# Allegro board QUADCOPTER1snsrbrd1_1.brd
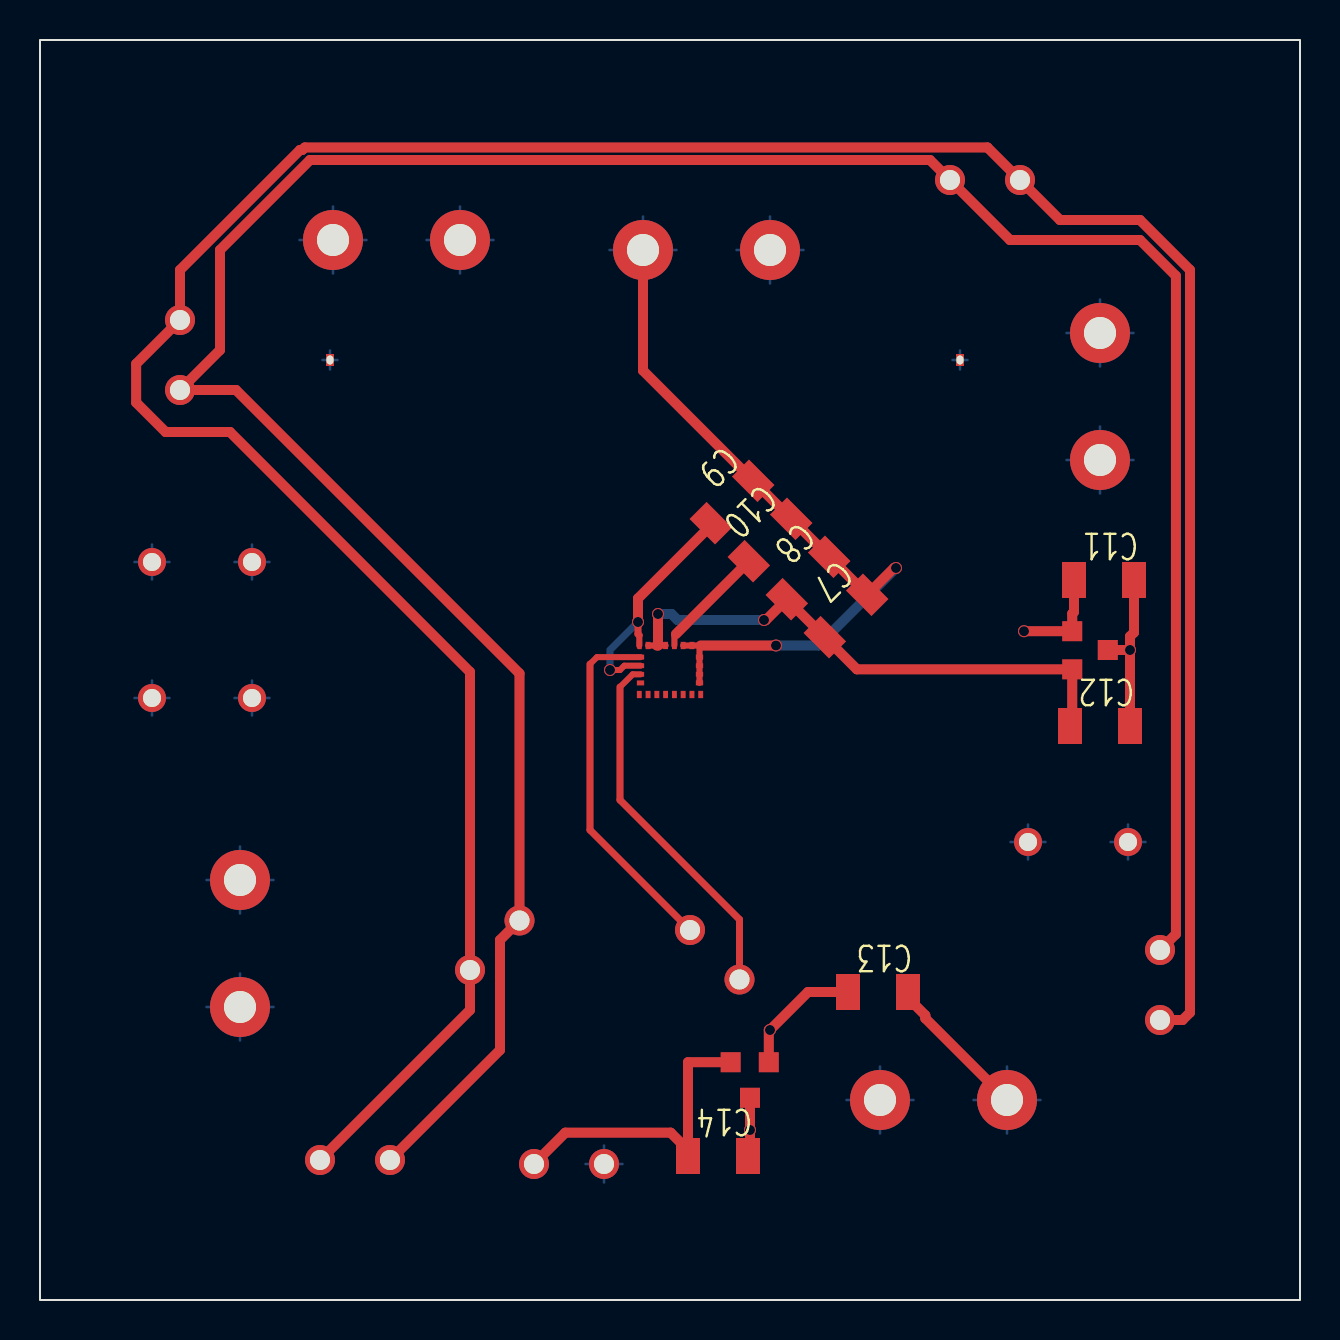
[diagram p0: board, top side]
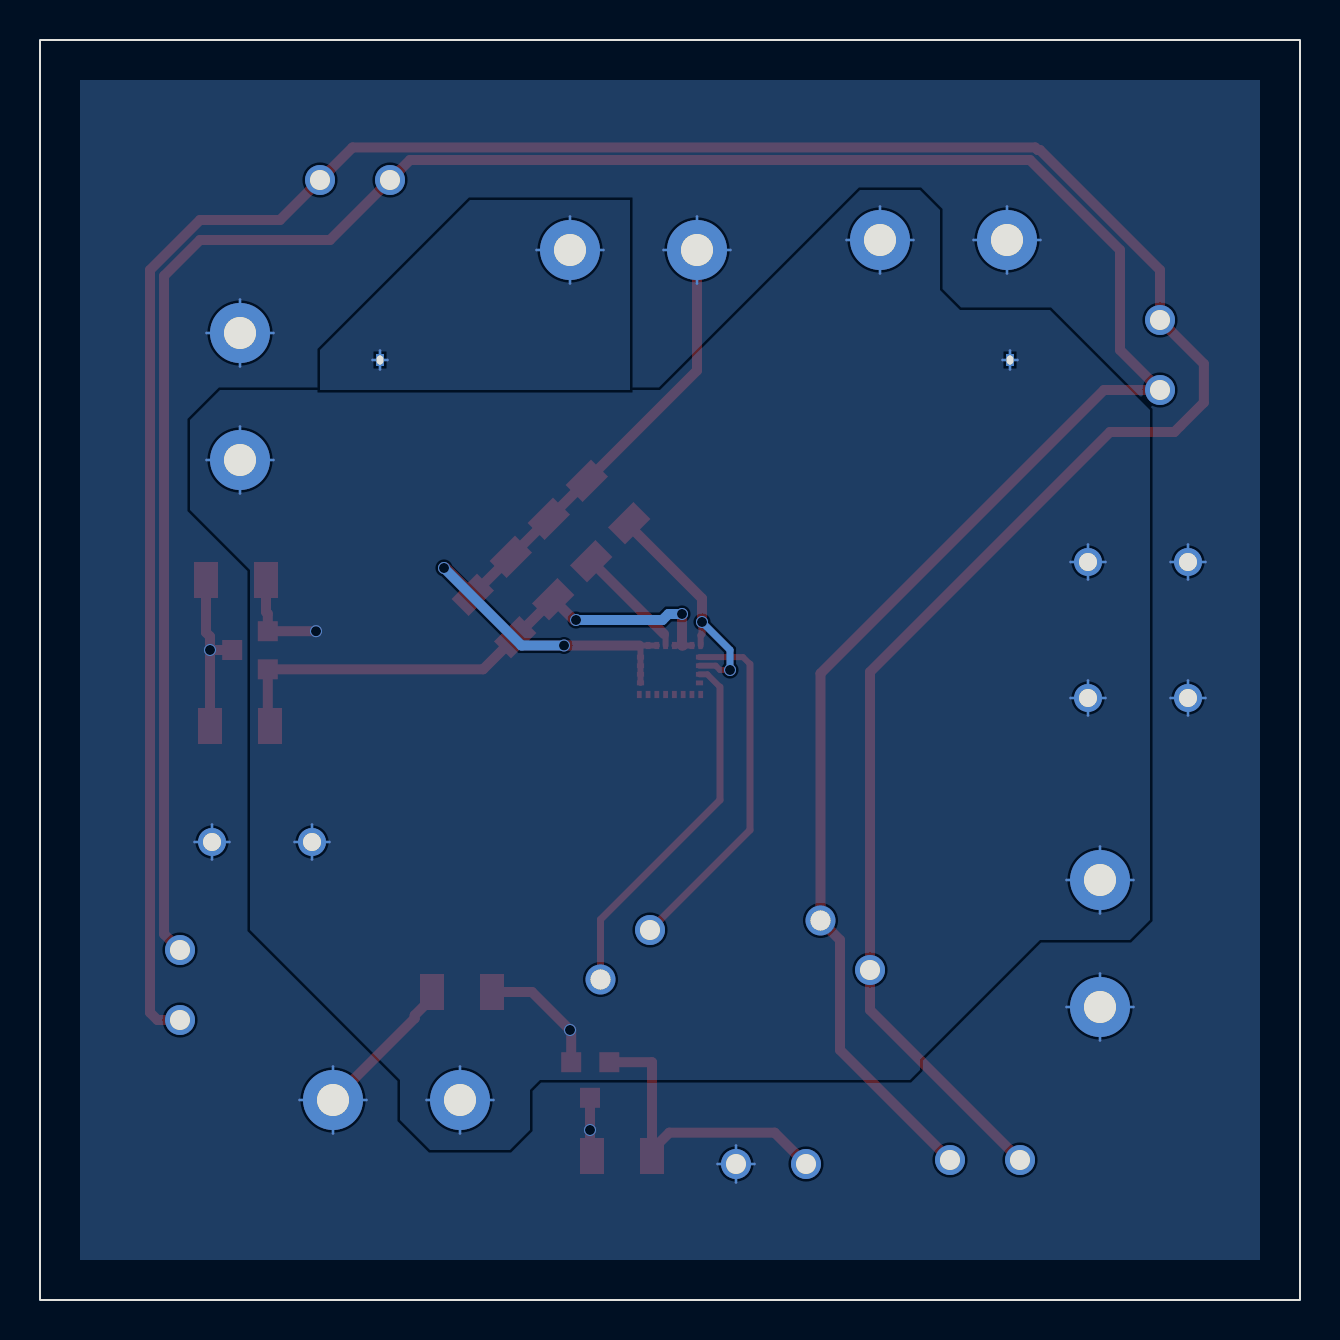
[diagram p1: board, bottom side, seen from below]

Outline 63 x 63 mm; copper layers: TOP, BOTTOM. Coordinates in mm from the lower left corner of the outline.
Outline path: rectangle 0,0 63,63

## Placement (name value [footprint] x y rotation side)
C7  100nF  [SMD_CAP_1206]  40.3 34.2 225 top
C8  10uF  [SMD_CAP_1206]  38.4 36.1 225 top
C9  100nF  [SMD_CAP_1206]  34.6 39.9 225 top
C10  10uF  [SMD_CAP_1206]  36.5 38 225 top
C11  10uF  [SMD_CAP_1206]  53.2 36 180 top
C12  10uF  [SMD_CAP_1206]  53 28.7 180 top
C13  10uF  [SMD_CAP_1206]  41.9 15.4 180 top
C14  10uF  [SMD_CAP_1206]  33.9 7.2 180 top
C15  100uF  [CAP250]  13.6 39.9 180 top
C16  100uF  [CAP250]  13.6 33.1 180 top
C17  100uF  [CAP250]  46.4 19.9 0 top
F1  FUSE  [FUSECLIP]  66 67 180 top
J1  CON2  [KDCONN2]  36.5 52.5 180 top
J2  CON2  [KDCONN2_2]  14 7 0 top
J3  CON2  [KDCONN2_2]  7 49 270 top
J4  CON2  [KDCONN2_2]  49 56 180 top
J5  CON2  [KDCONN2_2]  56 14 90 top
J6  CON2  [KDCONN2_2]  21.5 16.5 45 top
J7  CON2  [KDCONN2_2]  32.5 18.5 315 top
J8  CON2  [KDCONN2_2]  24.7 6.8 0 top
J9  CON2  [KDCONN2]  53 42 90 top
J10  CON2  [KDCONN2]  21 53 180 top
J11  CON2  [KDCONN2]  42 10 0 top
J12  CON2  [KDCONN2]  10 21 270 top
U5  LSM330_SENSOR  [SENSOR]  31.5 31.5 0 top
U6  LP38690-TO252  [SOT23]  52.5 32.5 0 top
U7  LP38690-TO252  [SOT23]  35.5 11 270 top

## Library data of the parts
C7-C14 = C
C15-C17 = CAP
F1 = FUSE
J1-J12 = CON2
U5 = LSM330_SENSOR_0
U6 U7 = LP38690-TO252

## Footprints (pads in the part's own frame, mm; a bottom-side part is the same pattern mirrored in y, then rotated)
CAP250
  round 1.4 hole 0.9: 1(3,3) 2(8,3)
FUSECLIP
  rect 0.4x0.6 hole 0.34x0.45: 1(20,20) 2(51.5,20)
KDCONN2
  round 3 hole 1.6: 1(0,0) 2(6.35,0)
KDCONN2_2
  round 1.5 hole 1: 1(0,0) 2(3.5,0)
SENSOR
  custom 0.24x0.36 smd: 1(-1.535,1.225)
  rect 0.36x0.24 smd: 2(-1.475,0.645) 3(-1.475,0.215) 4(-1.475,-0.215) 5(-1.475,-0.645) 14(1.475,-0.645) 15(1.475,-0.215) 16(1.475,0.215) 17(1.475,0.645)
  rect 0.24x0.36 smd: 6(-1.535,-1.225) 7(-1.096,-1.225) 8(-0.658,-1.225) 9(-0.219,-1.225) 10(0.219,-1.225) 11(0.658,-1.225) 12(1.097,-1.225) 13(1.535,-1.225) 18(1.535,1.225) 19(1.096,1.225) 20(0.658,1.225) 21(0.219,1.225) 22(-0.219,1.225) 23(-0.658,1.225) 24(-1.097,1.225)
SMD_CAP_1206
  rect 1.2x1.8 smd: 1(-1.5,0) 2(1.5,0)
SOT23
  rect 1x1 smd: 1(-0.889,0.94) 2(-0.889,-0.965) 3(0.889,0)

## Nets
3.3V: C7.2 C8.2 C12.2 U5.22(VDD#22) U5.23(VDD#23) U5.24(VDD#24) U6.2(VOUT)
5V: C14.2 J8.1 U7.2(VOUT)
12V: C11.2 C13.2 C15.1 C16.1 C17.1 F1.2 J9.1 J10.1 J11.1 J12.1 U6.1(VIN) U7.1(VIN)
GND: C7.1 C8.1 C9.1 C10.1 C11.1 C12.1 C13.1 C14.1 C15.2 C16.2 C17.2 J1.2 J8.2 J9.2 J10.2 J11.2 J12.2 U5.14(RES3) U5.15(RES2) U5.16(RES1) U5.17(RES0) U5.18(RES) U5.19(GND#19) U5.20(GND#20) U6.3(GND) U7.3(GND)
SCL1: J2.1 J3.1 J4.1 J5.1 J6.1
SCL2: J7.1 U5.2(SCL_A/G)
SDA1: J2.2 J3.2 J4.2 J5.2 J6.2
SDA2: J7.2 U5.4(SDA/SDL_A/G)
N159586: F1.1 J1.1
N160545: C9.2 U5.1(VDD_IO#1) U5.3(VDD_IO#3)
N168078: C10.2 U5.21(CAP)

Pads without a net: U5 5 6 7 8 9 10 11 12 13

## Via types
v1: diameter 0.6, hole 0.5, TOP to BOTTOM, 10 vias

## Routing (per net, layer and track width the routed paths; a pad name or vN(x,y) marks a point on that pad's centre or on a via; arc(x,y) is an arc through that point)
3.3V: length 28.1
  TOP w0.3: U5.24 U5.23 ; 30.9,32.73 U5.22
  TOP w0.5: v1(36.2,34) 36.3,34 C8.2 C7.2 40.84,31.53 U6.2 51.61,28.7 C12.2 ; U5.23 30.9,32.73 v1(30.9,34.3)
  BOTTOM w0.5: v1(36.2,34) 31.88,34 31.58,34.3 v1(30.9,34.3)
5V: length 15.5
  TOP w0.5: J8.1 26.27,8.37 31.53,8.37 32.4,7.5 ; 32.4,7.5 C14.2 ; 32.4,7.5 32.4,11.89 U7.2
12V: length 50.5
  TOP w0.5: v1(49.2,33.44) U6.1 51.61,34.32 51.7,34.41 C11.2 ; C13.2 38.4,15.4 v1(36.5,13.5) 36.44,13.5 U7.1
  BOTTOM w0.127: 10.6,36.02 C15.1 ; C15.1 10.6,37.78 ; C15.1 9.72,36.9 ; C15.1 11.48,36.9 ; J11.1 42,11.68 ; J11.1 43.68,10 ; J11.1 40.32,10 ; J11.1 42,8.32 ; 10,19.32 J12.1 ; J12.1 10,22.68 ; J12.1 8.32,21 ; J12.1 11.68,21 ; 14.5,46.52 F1.2 ; F1.2 14.88,47 ; F1.2 14.12,47 ; F1.2 14.5,47.48 ; J9.1 53,43.68 ; J9.1 53,40.32 ; J9.1 54.68,42 ; J9.1 51.32,42 ; 9.72,30.1 C16.1 ; C16.1 10.6,29.22 ; C16.1 10.6,30.98 ; C16.1 11.48,30.1 ; 19.32,53 J10.1 ; J10.1 22.68,53 ; J10.1 21,54.68 ; J10.1 21,51.32 ; 48.52,22.9 C17.1 ; C17.1 50.28,22.9 ; C17.1 49.4,23.78 ; C17.1 49.4,22.02
GND: length 104.8
  TOP w0.127: 32.98,32.73 U5.18
  TOP w0.3: U5.14 U5.15 U5.16 U5.17 32.98,32.73 U5.19 U5.20
  TOP w0.5: J11.2 44.27,14.08 44.27,14.23 43.4,15.1 C13.1 ; v1(54.5,32.5) 54.5,33.18 54.7,33.38 C11.1 ; v1(54.5,32.5) U6.3 ; v1(54.5,32.5) C12.1 ; U7.3 v1(35.5,8.5) 35.5,7.1 ; v1(42.8,36.6) 42.7,36.6 C7.1 C8.1 C10.1 C9.1 30.15,46.47 J1.2 ; U5.18 v1(36.8,32.73)
  BOTTOM w0.127: 51.32,48.35 J9.2 ; J9.2 53,46.67 ; J9.2 53,50.03 ; J9.2 54.68,48.35 ; 28.2,5.87 J8.2 ; J8.2 28.2,7.73 ; J8.2 29.13,6.8 ; J8.2 27.27,6.8 ; 4.72,36.9 C15.2 ; C15.2 5.6,36.02 ; C15.2 5.6,37.78 ; C15.2 6.48,36.9 ; J10.2 16.33,53 ; J10.2 12.97,53 ; J10.2 14.65,51.32 ; J10.2 14.65,54.68 ; 10,12.97 J12.2 ; J12.2 11.68,14.65 ; J12.2 8.32,14.65 ; J12.2 10,16.33 ; J1.2 30.15,54.18 ; J1.2 28.47,52.5 ; J1.2 31.83,52.5 ; J1.2 30.15,50.82 ; 53.52,22.9 C17.2 ; C17.2 54.4,22.02 ; C17.2 55.28,22.9 ; C17.2 54.4,23.78 ; 5.6,29.22 C16.2 ; C16.2 5.6,30.98 ; C16.2 6.48,30.1 ; C16.2 4.72,30.1 ; 46.67,10 J11.2 ; J11.2 48.35,11.68 ; J11.2 50.03,10 ; J11.2 48.35,8.32
  BOTTOM w0.5: v1(36.8,32.73) 38.92,32.73 v1(42.8,36.6)
SCL1: length 151.7
  TOP w0.5: J5.1 57.13,14 57.5,14.37 57.5,51.5 55,54 51,54 J4.1 47.37,57.63 13.24,57.63 13.11,57.5 13,57.5 7,51.5 J3.1 4.81,46.81 4.81,44.87 6.28,43.4 9.5,43.4 21.5,31.4 J6.1 21.5,14.5 J2.1
SCL2: length 18
  TOP w0.3: U5.2 27.85,32.15 27.5,31.8
  TOP w0.35: J7.1 27.5,23.5 27.5,31.8
SDA1: length 143.8
  TOP w0.5: J5.2 56.8,18.3 56.8,51.2 55,53 48.5,53 J4.2 44.5,57 13.5,57 9,52.5 9,47.5 J3.2 9.8,45.5 23.97,31.33 J6.2 23,18 23,12.5 J2.2
SDA2: length 18.4
  TOP w0.3: U5.4 29.64,31.29 29,30.65
  TOP w0.35: 29,30.65 29,25 34.97,19.03 J7.2
N159586: length 8.4
  BOTTOM w0.127: 46,46.52 F1.1 ; F1.1 46,47.48 ; F1.1 46.38,47 ; F1.1 45.62,47 ; J1.1 36.5,54.18 ; J1.1 36.5,50.82 ; J1.1 38.18,52.5 ; J1.1 34.82,52.5
N160545: length 12.1
  TOP w0.3: U5.3 29.21,31.71 29,31.5 v1(28.5,31.5) ; 29.96,33.23 U5.1
  TOP w0.35: v1(29.9,33.9) 29.9,33.3 29.96,33.23
  TOP w0.5: 33.6,38.6 33.42,38.6 29.9,35.08 v1(29.9,33.9)
  BOTTOM w0.35: v1(28.5,31.5) 28.5,32.5 v1(29.9,33.9)
N168078: length 5.8
  TOP w0.3: U5.21 31.72,33.22 31.8,33.3
  TOP w0.5: 31.8,33.3 C10.2

## Copper pours and planes (outline as drawn; the poured copper is in the pictures)
12V on BOTTOM: 38.5,8.5 39.5,7.5 43.5,7.5 45,9 45,11 52.5,18.5 52.5,36.5 55.5,39.5 55.5,44 54,45.5 32,45.5 22,55.5 19,55.5 18,54.5 18,50.5 17,49.5 12.5,49.5 7.5,44.5 7.5,19 8.5,18 13,18 19,12 19,11.5 19.5,11 38,11 38.5,10.5
GND on BOTTOM: 2,2 2,61 61,61 61,2 ; 1 cut-out
N159586 on BOTTOM: 33.5,55 33.5,45.5 49,45.5 49,47.5 41.5,55
